# Altium PCB RIAA_Correctiefilter2.PcbDoc
Units mil, origin at the board's own origin, x right, y up, seen from the top; angles counter-clockwise.
Board outline 6000 x 4000 mil, 2 copper layers (Top Layer, Bottom Layer); 39 components, 23 nets, 105 pads, 0 vias.
Unrouted connection lines stored in the file: 63.
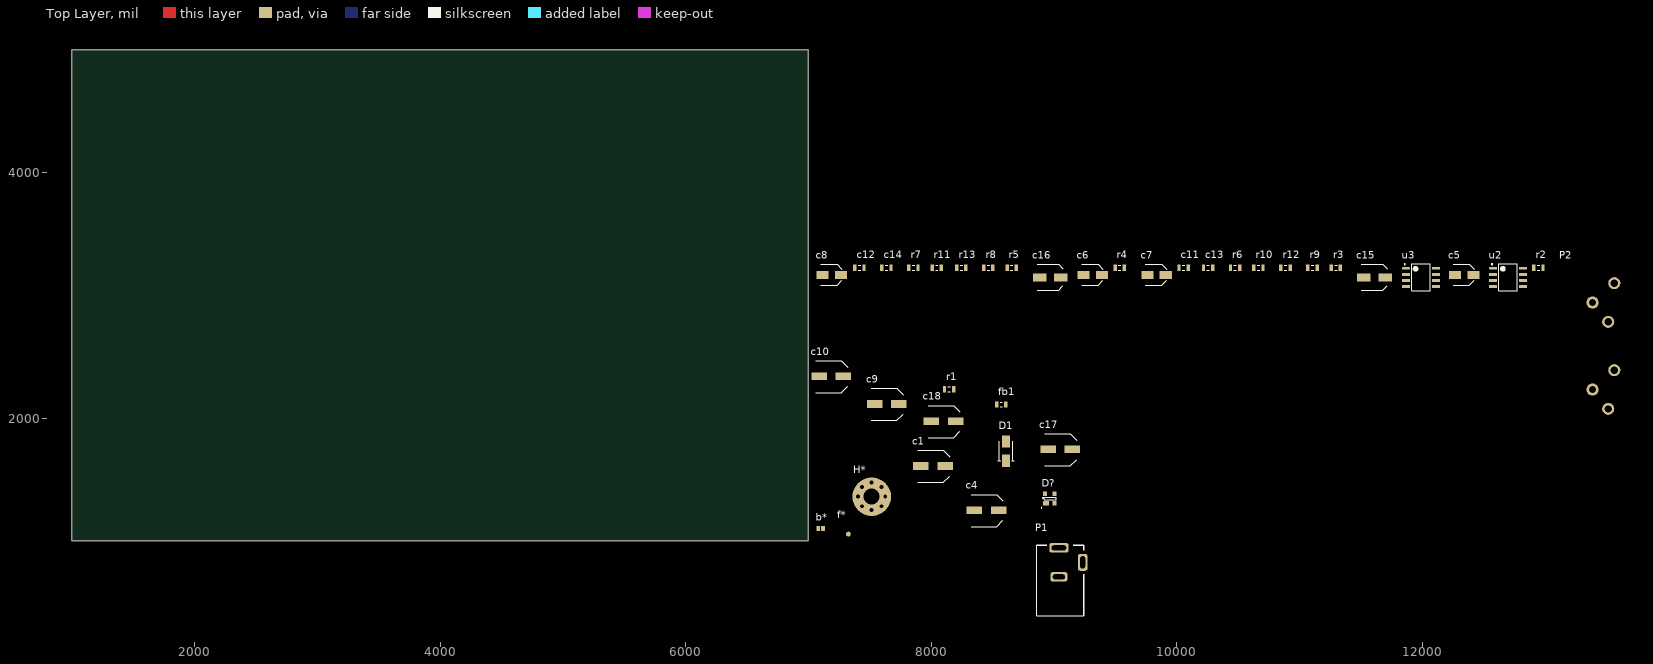
[diagram p0: Top Layer view]
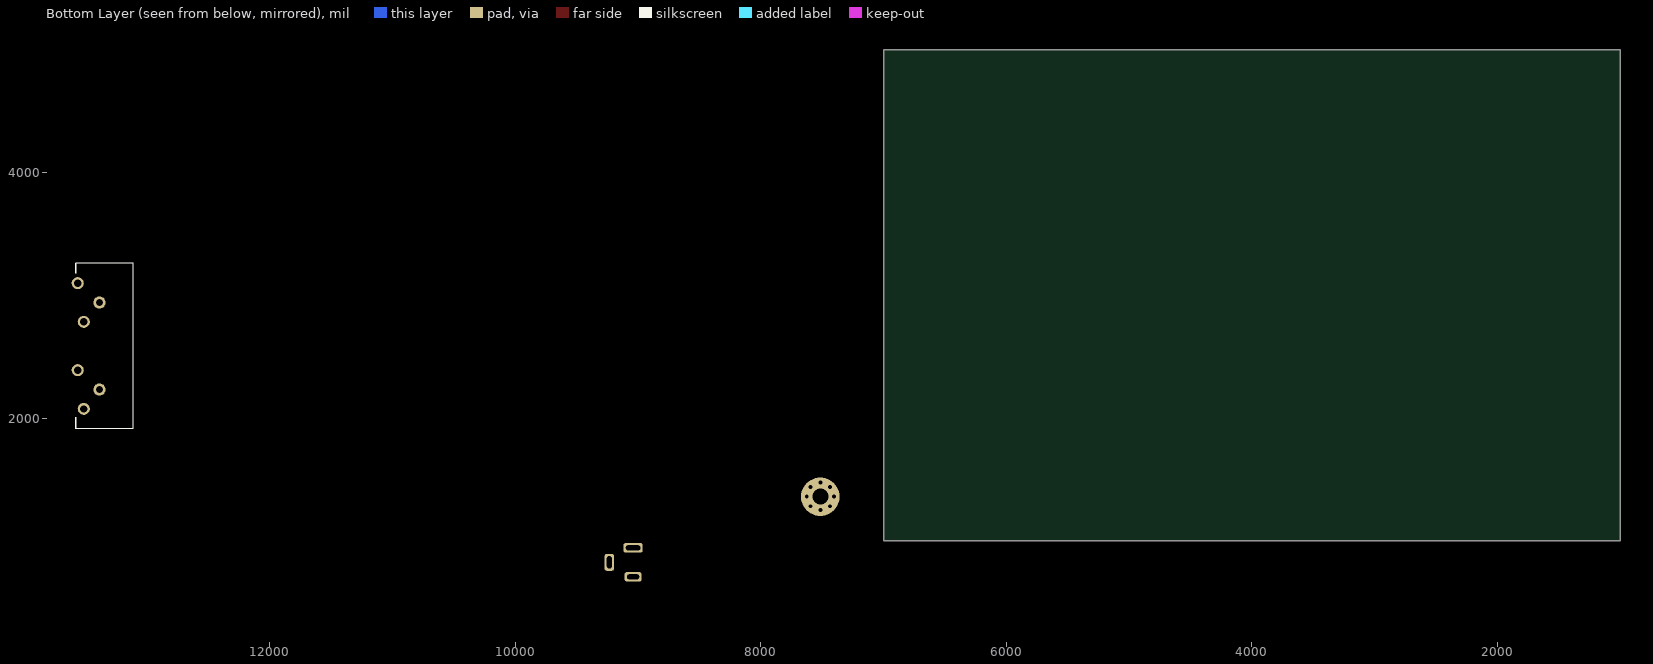
[diagram p1: Bottom Layer view, seen from below]

## Layer stack, top to bottom
Top Solder: solder mask 0.4, Solder Resist, Dk 3.5
Top Layer: signal copper 1.4
Dielectric 1: dielectric 12.6, FR-4, Dk 4.8
Bottom Layer: signal copper 1.4
Bottom Solder: solder mask 0.4, Solder Resist, Dk 3.5

## Board outline
1000,1000 7000,1000 7000,5000 1000,5000

## Design rules (kind name [scope] priority, off if disabled: settings)
Clearance [All] p1: gap=10 ignorepadtopadclearanceinfootprint=FALSE except(0: Arc-Hole Track-Hole SMDPad-Hole THPad-Hole Via-Hole Fill-Hole Poly-Hole Region-Hole Text-Hole)
Height [All] p1: minheight=0 maxheight=3149.61 prefheight=1181.1
PolygonConnect [All] p1: connectstyle=Relief reliefconductorwidth=10 reliefentries=4 polygonreliefangle="90 Angle" airgapwidth=10
RoutingVias [All] p1: holewidth=28 width=50 viastyle="Through Hole" minholewidth=28 minwidth=50 maxholewidth=28 maxwidth=50
SolderMaskExpansion [All] p1: expansion=4
Width [All] p1: maxlimit=10 minlimit=10 preferedwidth=10
29 further rules are at their usual default settings.

## Classes and differential pairs
component class PowerSupply: b* c1 c4 D1 D? f* fb1 H* P1 r1
component class Preamp&Filter: c5 c6 c7 c8 c9 c10 c11 c12 c13 c14 c15 c16 c17 c18 P2 r2 r3 r4 r5 r6 r7 r8 r9 r10 r11 r12 r13 u2 u3

## Components (designator, comment, footprint, x,y, rotation, side; value= is the part's Value field where it differs from the comment)
b* "Solder Bridge" "SOLDER BRIDGE" 7100,1100 r0 top
c1 "*" ELCO-D 8015,1610 r0 top
c4 "*" ELCO-D 8450,1250 r0 top
c5 "*" ELCO-B 12340,3165 r0 top
c6 "*" ELCO-B 9315,3165 r0 top
c7 "*" ELCO-B 9835,3165 r0 top
c8 "*" ELCO-B 7190,3165 r0 top
c9 "*" ELCO-D 7638.43,2115 r0 top
c10 "*" ELCO-D 7185,2340 r0 top
c11 "*" 0805 10055,3225 r0 top
c12 "*" 0805 7415,3225 r0 top
c13 "*" 0805 10255,3225 r0 top
c14 "*" 0805 7635,3225 r0 top
c15 "*" ELCO-C 11610,3145 r0 top
c16 "*" ELCO-C 8970,3145 r0 top
c17 "*" ELCO-D 9050,1745 r0 top
c18 "*" ELCO-D 8100,1975 r0 top
D1 "*" SMA 8610,1731.26 r90 top
D? "Bridge Rectifier" SOT-143 8965,1345 r0 top
f* "Fiducial" FIDUCIAL 7325,1055 r0 top
fb1 "*" 0805 8570,2110 r0 top
H* "Mounting Hole" "Mounting Hole" 7515,1360 r0 top
P1 "DC Power Jack" "POWER JACK" 9040,825 r90 top
P2 "*" "RCA 4-WAY" 13480,2185 r90 top
r1 "*" 0805 8145.2,2235 r0 top
r2 "*" 0805 12945,3225 r0 top
r3 "*" 0805 11295,3225 r0 top
r4 "*" 0805 9535,3225 r0 top
r5 "*" 0805 8655,3225 r0 top
r6 "*" 0805 10475,3225 r0 top
r7 "*" 0805 7855,3225 r0 top
r8 "*" 0805 8465,3225 r0 top
r9 "*" 0805 11105,3225 r0 top
r10 "*" 0805 10665,3225 r0 top
r11 "*" 0805 8045,3225 r0 top
r12 "*" 0805 10885,3225 r0 top
r13 "*" 0805 8245,3225 r0 top
u2 "*" R-PDSO-G8-P127D620X530 12710,3145 r0 top
u3 "*" R-PDSO-G8-P127D620X530 12000,3145 r0 top

## Footprints (in the part's own frame and the unit in brackets; to place one, negate y for a bottom-side part, rotate by r counter-clockwise, add the part's x,y. Pads: shape width x height; smd on the part's side, far side on the other; paste and mask are expansions set on the pad)
0805 [mm] "Generic Package"
  rect 0.7x1.3 smd: 1(-0.95,0) 2(0.95,0)
  silkscreen extent -0.25,-0.5 0.25,0.5, body extent -1,-0.63 1,0.63, height 0.43
ELCO-B [mm] "SMD Electrolytic Capacitor-Size B-Pitch 1mm-4.3mm x 5.4mm"
  rect 2.5x1.6 smd: 1(-1.9,0) 2(1.9,0)
  silkscreen extent -2.3,-2.1 2.1,2.2, body extent -2.55,-2.1 2.45,2.2, height 6.42
ELCO-C [mm] "SMD Electrolytic Capacitor-Size B-Pitch 1mm-5.3mm x 5.4mm"
  rect 2.8x1.6 smd: 1(-2.2,0) 2(2.2,0)
  silkscreen extent -2.7,-2.6 2.6,2.7, body extent -2.95,-2.65 2.95,2.65, height 5.41
ELCO-D [mm] "SMD Electrolytic Capacitor-Size D-Pitch 1.8mm-6.3mm x 5.4mm"
  rect 3.2x1.6 smd: 1(-2.5,0) 2(2.5,0)
  silkscreen extent -3.2,-3.4 3.4,3.2, body extent -3.15,-2.65 3.15,2.65, height 5.7
FIDUCIAL [mm]
  round 1 smd mask+1: 0(0,0)
"Mounting Hole" [mm]
  round 0 hole 0.8: 0(-2.8,0) 0(-2,-2) 0(-2,2) 0(0,-2.8) 0(0,2.9) 0(2,-2) 0(2,2) 0(2.8,0)
  round 8 hole 3.3: 0(0,0)
"POWER JACK" [mm] "6mm Jack plug"
  rrect50% 2x4 hole 1 slot 3 at 90 deg: 1(3,0)
  rrect50% 2x3.5 hole 1 slot 2.5 at 90 deg: 2(-3,0)
  rrect50% 3.5x2 hole 1 slot 2.5 at 0 deg: 2(0,-4.9)
  silkscreen extent -11,-5.1 3.5,4.6, body extent -11.05,-5.15 3.45,4.65, height 11
R-PDSO-G8-P127D620X530 [mm] "TI SOIC8 package, 127 Pitch, 620x530 Dimensions"
  oval 1.65x0.6 smd: 1(-3.4,1.9)
  rect 1.65x0.6 smd: 2(-3.4,0.6) 3(-3.4,-0.6) 4(-3.4,-1.9) 5(2.8,-1.9) 6(2.8,-0.6) 7(2.8,0.6) 8(2.8,1.9)
  silkscreen extent -3.75,-2.8 1.6,2.88, body extent -3.43,-2.5 2.83,2.5, height 1.75
"RCA 4-WAY" [mm] "Vertical RCA connector with 4 connectors"
  round 2.5 hole 1.5: 1(19.2,2.4) 2(15.2,-0.85) 3(23.2,-2.1) 4(1.2,2.4) 5(-2.8,-0.85) 6(5.2,-2.1)
  rect 0x0 hole 1.7 square: ""(-6,1.9) ""(26.4,1.9)
SMA [mm] "SMA Diode Package"
  rect 2.5x1.7 smd: 1(-2,0) 2(2,0)
  silkscreen extent -2,-1.7 2,1.7, body extent -2.56,-1.7 2.76,1.7, height 2.2
"SOLDER BRIDGE" [mm]
  rect 0.8x1 smd: 1(-0.5,0) 2(0.5,0)
SOT-143 [mm]
  rect 1.2x0.9 smd: 1(-0.8,-1)
  rect 0.8x0.9 smd: 2(1,-1) 3(1,1) 4(-1,1)
  silkscreen extent -1.8,-2 1.4,0.3, body extent -1.46,-1.21 1.46,1.21, height 1

## Part data
c1 c4 c9 c10 c17 c18: library part "Elco D", "Elco size D 6.3x5.4"
c5 c6 c7 c8: library part "Elco B"
c11 c12 c13 c14: library part "0805 Capacitor", "0805 Capacitor Package"
c15 c16: library part "Elco C"
D1: library part B220A-13-F, "Schottky Rectifier"
fb1: library part "Ferrite Bead 0805 Package", "Ferrite Bead"
P2: library part PSG01551, "4-way RCA connector"
r1 r2 r3 r4 r5 r6 r7 r8 r9 r10 r11 r12 r13: library part "0805 Resistor", "0805 Resistor package"
u2: library part NE5532x, "Dual Low-Noise OpAmp"
u3: library part TL027x, "Low-Noise JFET-input OpAmp"

## Nets (pads, with @x,y where several pads share a name; then routed paths per layer and width w, separated by ;. In a path a pad name is that pad's centre, name@x,y a point inside that pad or via, vN(x,y) a via of type N, cw(c..) or ccw(c..) an arc to the next point about the centre after c; other vN are vias at no path point)
GND: c1.1 c4.1 c7.1 c8.1 c9.1 c10.1 c18.1 P1.2 P2.1 P2.4 r3.2 r5.2 u2.4 u3.4
Netc1_2: c1.2 fb1.2
Netc5_1: c5.1 P2.2
Netc5_2: c5.2 r2.2 r3.1 u2.3
Netc6_1: c6.1 P2.3
Netc6_2: c6.2 r4.2 r5.1 u2.5
Netc7_2: c7.2 r6.2
Netc8_2: c8.2 r7.2
Netc9_2: c9.2 c11.1 r10.1 u3.2
Netc10_2: c10.2 c12.1 r11.1 u3.6
Netc11_2: c11.2 c13.1 r10.2 r12.1
Netc12_2: c12.2 c14.1 r11.2 r13.1
Netc13_2: c13.2 c15.2 r12.2 u3.1
Netc14_2: c14.2 c16.2 r13.2 u3.7
Netc15_1: c15.1 P2.5
Netc16_1: c16.1 P2.6
NetD1_1: D1.1 fb1.1
NetD1_2: D1.2 P1.1
Netr6_1: r6.1 r9.1 u2.2
Netr7_1: r7.1 r8.1 u2.6
Netr8_2: r8.2 u2.7 u3.5
Netr9_2: r9.2 u2.1 u3.3
VCC: c4.2 c17.1 c17.2 c18.2 r1.2 r2.1 r4.1 u2.8 u3.8
pads on no net: b*.1 b*.2 D?.1 D?.2 D?.3 D?.4 f*.0 H*.0 P2. r1.1